# Altium PCB keypad4x5.PcbDoc
Units mil, origin at the board's own origin, x right, y up, seen from the top; angles counter-clockwise.
Board outline 3140 x 2430 mil, 2 copper layers (Top Layer, Bottom Layer); 22 components, 9 nets, 49 pads, 0 vias.
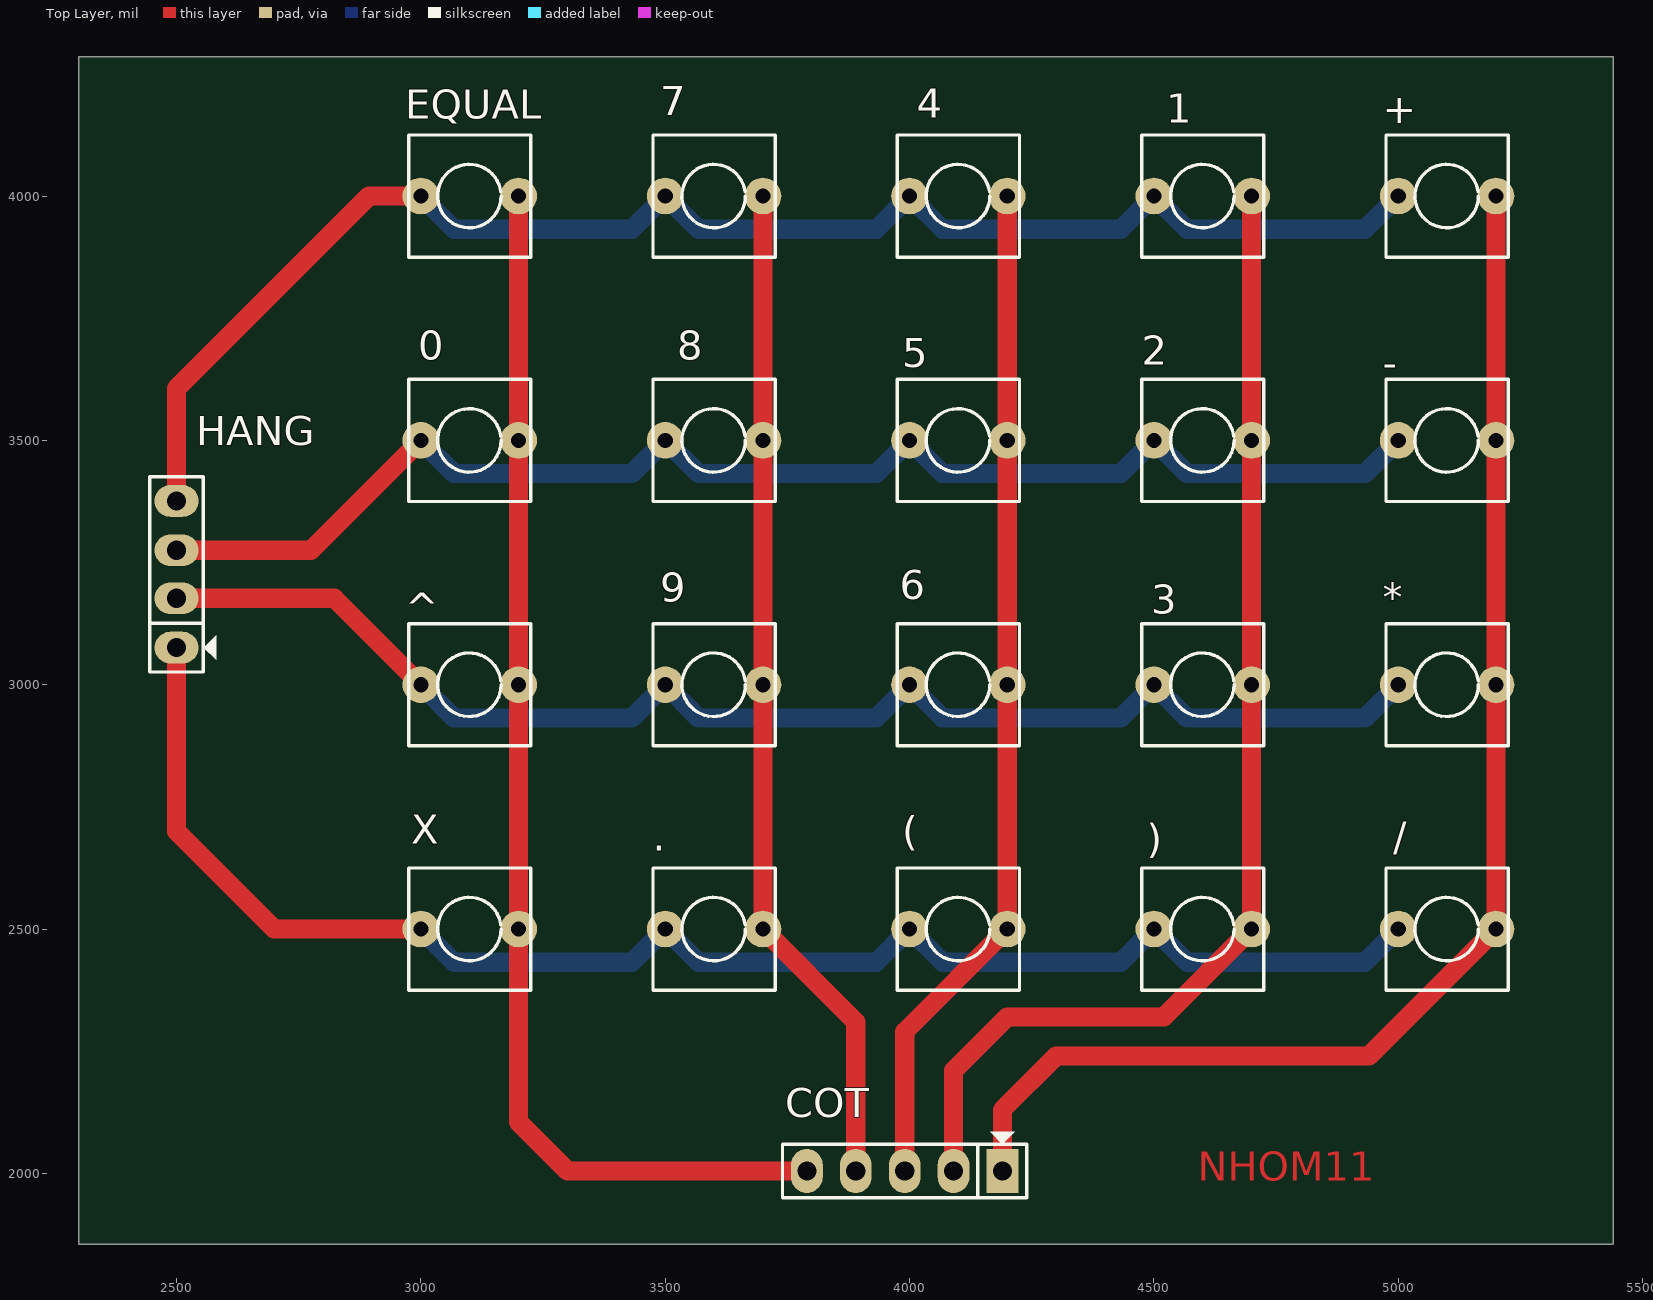
[diagram p0: Top Layer view]
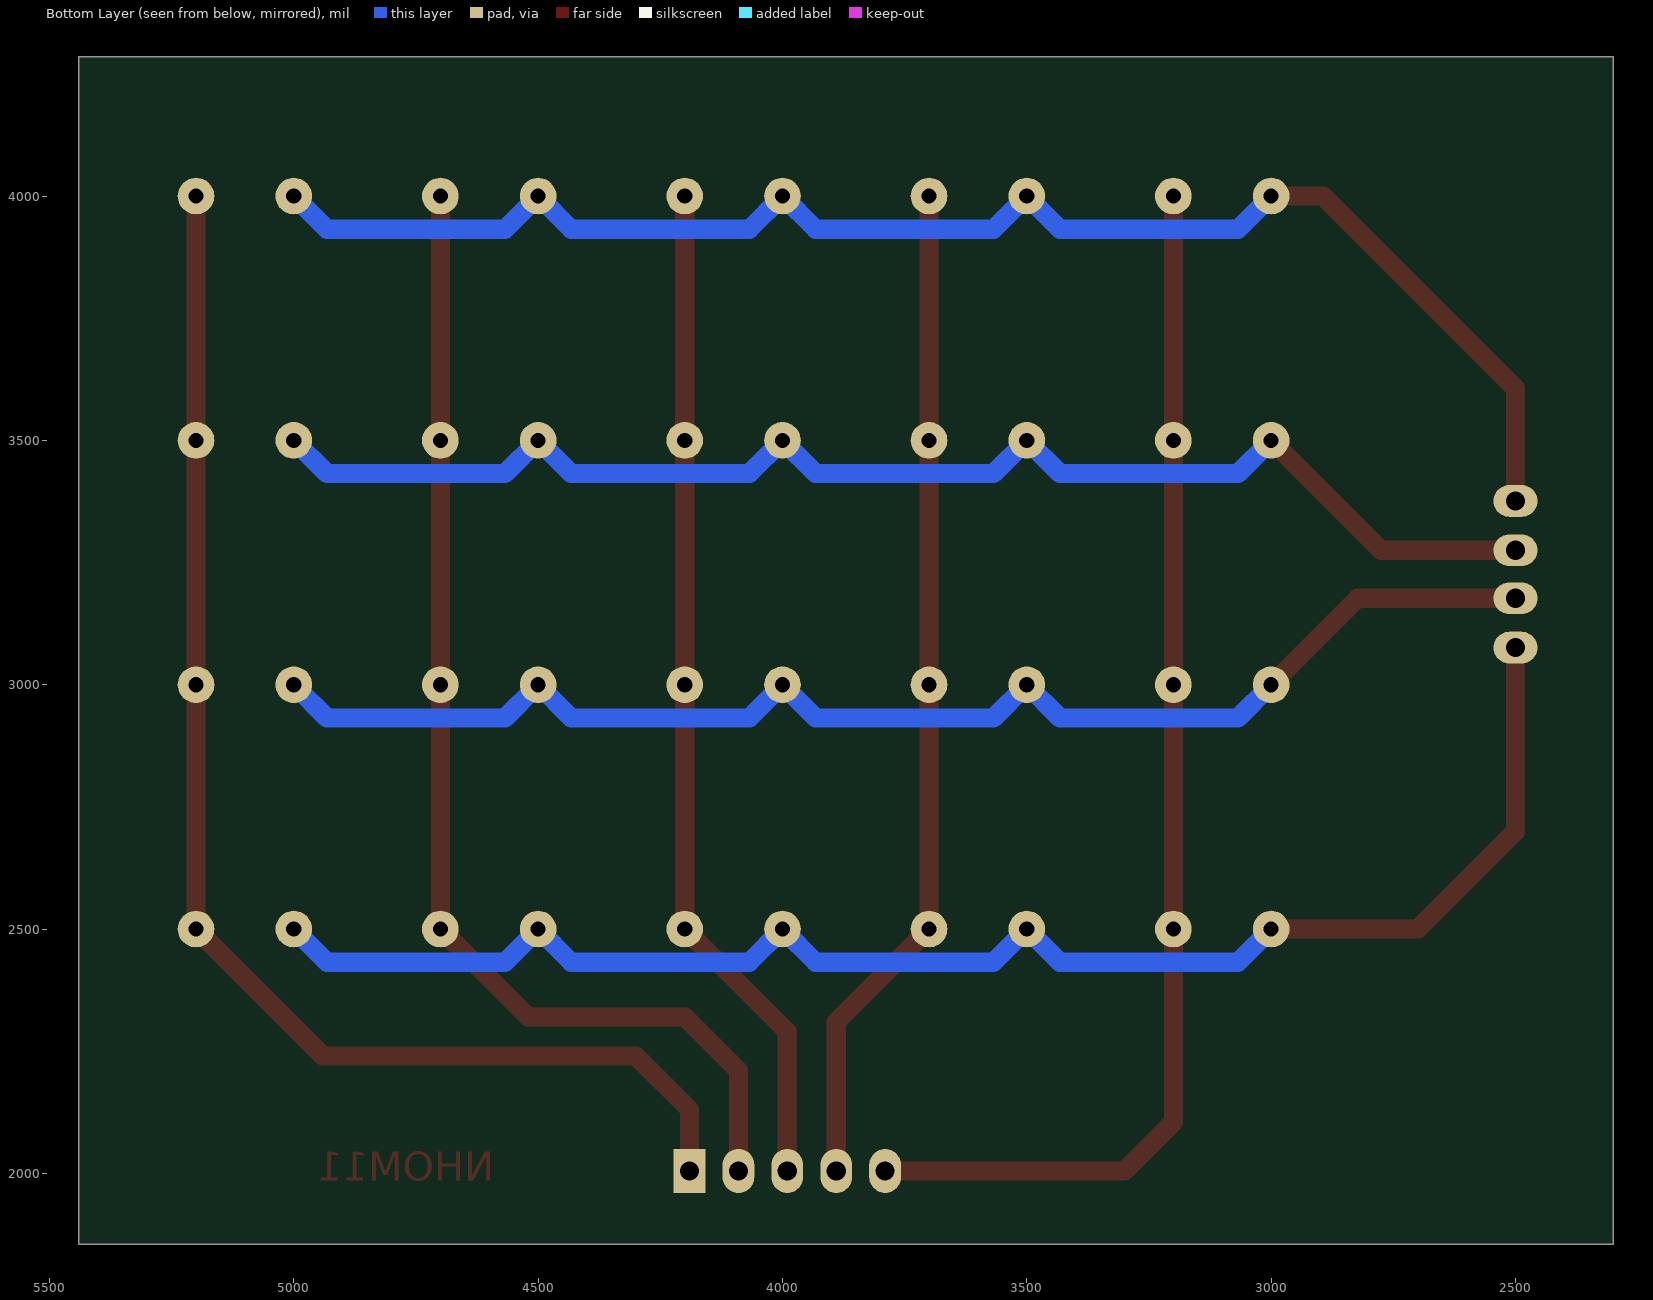
[diagram p1: Bottom Layer view, seen from below]

## Layer stack, top to bottom
Top Solder: solder mask 0.4, Solder Resist, Dk 3.5
Top Layer: signal copper 1.4
Dielectric 1: dielectric 12.6, FR-4, Dk 4.8
Bottom Layer: signal copper 1.4
Bottom Solder: solder mask 0.4, Solder Resist, Dk 3.5

## Board outline
2300,1855 5440,1855 5440,4285 2300,4285

## Design rules (kind name [scope] priority, off if disabled: settings)
Clearance [All] p1: gap=10 ignorepadtopadclearanceinfootprint=FALSE
PolygonConnect [All] p1: connectstyle=Relief reliefconductorwidth=10 reliefentries=4 polygonreliefangle="90 Angle" airgapwidth=10
RoutingVias [All] p1: holewidth=28 width=50 viastyle="Through Hole" minholewidth=28 minwidth=50 maxholewidth=28 maxwidth=50
SolderMaskExpansion [All] p1: expansion=4 istentingtop=FALSE
Width [All] p1: maxlimit=39.37 minlimit=39.37 preferedwidth=39.37 minimp=50.000000 maximp=50.000000 favimp=50.000000
30 further rules are at their usual default settings.

## Components (designator, comment, footprint, x,y, rotation, side; value= is the part's Value field where it differs from the comment)
0 "SW" SW2 3000,3500 r0 top value="SW chip 2 pin"
1 "SW" SW2 4500,4000 r0 top value="SW chip 2 pin"
2 "SW" SW2 4500,3500 r0 top value="SW chip 2 pin"
3 "SW" SW2 4500,3000 r0 top value="SW chip 2 pin"
4 "SW" SW2 4000,4000 r0 top value="SW chip 2 pin"
5 "SW" SW2 4000,3500 r0 top value="SW chip 2 pin"
6 "SW" SW2 4000,3000 r0 top value="SW chip 2 pin"
7 "SW" SW2 3500,4000 r0 top value="SW chip 2 pin"
8 "SW" SW2 3500,3500 r0 top value="SW chip 2 pin"
9 "SW" SW2 3500,3000 r0 top value="SW chip 2 pin"
( "SW" SW2 4000,2500 r0 top value="SW chip 2 pin"
) "SW" SW2 4500,2500 r0 top value="SW chip 2 pin"
* "SW" SW2 5000,3000 r0 top value="SW chip 2 pin"
+ "SW" SW2 5000,4000 r0 top value="SW chip 2 pin"
- "SW" SW2 5000,3500 r0 top value="SW chip 2 pin"
. "SW" SW2 3500,2500 r0 top value="SW chip 2 pin"
/ "SW" SW2 5000,2500 r0 top value="SW chip 2 pin"
^ "SW" SW2 3000,3000 r0 top value="SW chip 2 pin"
COT "JP5 PIN" JP5 4190,2005 r180 top value=JP5
EQUAL "SW" SW2 3000,4000 r0 top value="SW chip 2 pin"
HANG "JP4 PIN" JP4 2500,3176 r90 top value=JP4
X "SW" SW2 3000,2500 r0 top value="SW chip 2 pin"

## Footprints (in the part's own frame and the unit in brackets; to place one, negate y for a bottom-side part, rotate by r counter-clockwise, add the part's x,y. Pads: shape width x height; smd on the part's side, far side on the other; paste and mask are expansions set on the pad)
JP4 [mil] "Jumper 4"
  oval 65x90 hole 39.37: 1(-100,0) 2(1,0) 3(99,0) 4(200,0)
  silkscreen extent -150,-81 250,55, body extent -148,-48 248,50, height 354
JP5 [mil] "JP5"
  rect 65x90 hole 39.37: 1(0,0)
  oval 65x90 hole 39.37: 2(100,0) 3(200,0) 4(300,0) 5(400,0)
  silkscreen extent -50,-80 450,55, body extent -50,-49 446,49, height 354
SW2 [mil] "SW button 2pin, 250x 250 mil"
  round 75 hole 31: 1(0,0) 2(200,0)
  silkscreen extent -25,-125 225,125

## Part data
0 1 2 3 4 5 6 7 8 9 ( ) * + - . / ^ EQUAL X: library part SW2, "Switch button 2 pin"
COT: library part JP5
HANG: library part JP4

## Nets (pads, with @x,y where several pads share a name; then routed paths per layer and width w, separated by ;. In a path a pad name is that pad's centre, name@x,y a point inside that pad or via, vN(x,y) a via of type N, cw(c..) or ccw(c..) an arc to the next point about the centre after c; other vN are vias at no path point)
Net0_1: 0.1 2.1 5.1 8.1 -.1 HANG.3 | length 2818.5
  Top Layer w39.37: HANG.3 2775,3275 0.1
  Bottom Layer w39.37: 0.1 3068,3432 3432,3432 8.1 3568,3432 3932,3432 5.1 4068,3432 4432,3432 2.1 4568,3432 4932,3432 -.1
Net0_2: 0.2 ^.2 COT.5 EQUAL.2 X.2 | length 2526.4
  Top Layer w39.37: EQUAL.2 0.2 ^.2 X.2 3200,2105 3300,2005 COT.5
Net1_1: 1.1 4.1 7.1 +.1 EQUAL.1 HANG.4 | length 3118.5
  Top Layer w39.37: HANG.4 2500,3606 2894,4000 EQUAL.1
  Bottom Layer w39.37: EQUAL.1 3068,3932 3432,3932 7.1 3568,3932 3932,3932 4.1 4068,3932 4432,3932 1.1 4568,3932 4932,3932 +.1
Net1_2: 1.2 2.2 3.2 ).2 COT.2 | length 2435.1
  Top Layer w39.37: COT.2 4090,2210 4200,2320 4520,2320 ).2 3.2 2.2 1.2
Net3_1: 3.1 6.1 9.1 *.1 ^.1 HANG.2 | length 2798.6
  Top Layer w39.37: HANG.2 2823,3177 ^.1
  Bottom Layer w39.37: ^.1 3068,2932 3432,2932 9.1 3568,2932 3932,2932 6.1 4068,2932 4432,2932 3.1 4568,2932 4932,2932 *.1
Net4_2: 4.2 5.2 6.2 (.2 COT.3 | length 2082
  Top Layer w39.37: COT.3 3990,2290 4200,2500 6.2 5.2 4.2
Net7_2: 7.2 8.2 9.2 ..2 COT.4 | length 2073.7
  Top Layer w39.37: 7.2 8.2 9.2 ..2 3890,2310 COT.4
Net(_1: (.1 ).1 ..1 /.1 HANG.1 X.1 | length 3184.2
  Top Layer w39.37: HANG.1 2500,2700 2700,2500 X.1
  Bottom Layer w39.37: X.1 3068,2432 3432,2432 ..1 3568,2432 3932,2432 4000,2500 4068,2432 4432,2432 ).1 4568,2432 4932,2432 /.1
Net*_2: *.2 +.2 -.2 /.2 COT.1 | length 2788.3
  Top Layer w39.37: COT.1 4190,2130 4300,2240 4940,2240 /.2 *.2 -.2 +.2

## Other copper
Top Layer:
  text "NHOM11" at 4590,1985 h60